# EAGLE board source_eagle (EAGLE 9.6.2)
REV: B
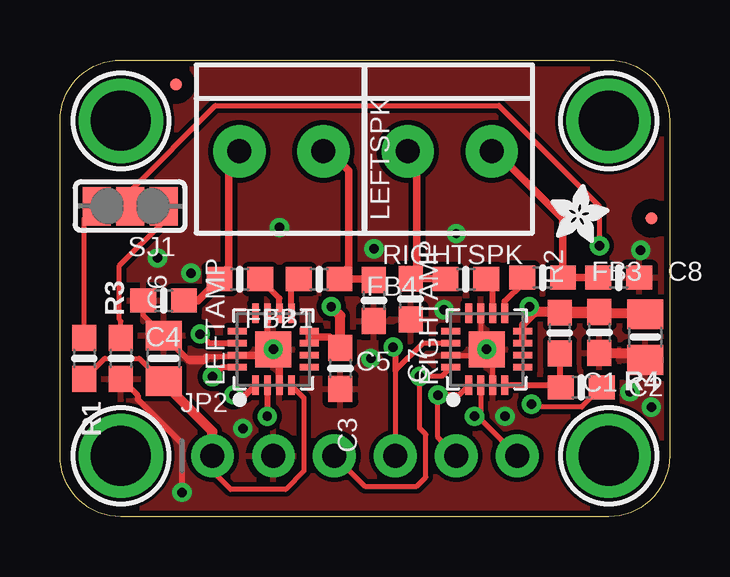
[diagram p0: board, top side]
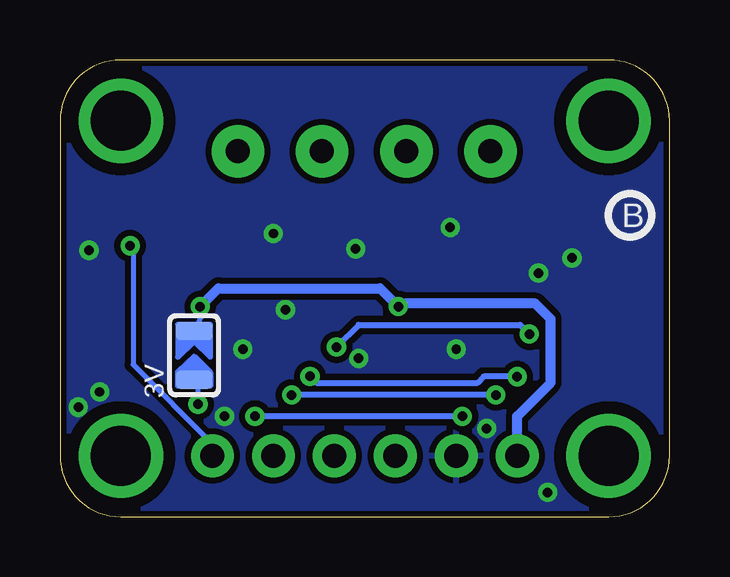
[diagram p1: board, bottom side, seen from below]

Size 25.4 x 19.05 mm. Coordinates in mm from the lower left corner, seen from the top.
Outline: 0,2.54 0,16.51 arc-90 2.54,19.05 22.86,19.05 arc-90 25.4,16.51 25.4,2.54 arc-90 22.86,0 2.54,0 arc-90 0,2.54
Copper layers (1*16): Top 0.035mm / dielectric 1.5mm / Bottom 0.035mm
Design rules "adafruit": minimum track width 8mil, minimum drill 15.5mil, track to track 8mil, track to pad 8mil, pad to pad 8mil, via to via 8mil, smd to smd 8mil, copper to edge 10mil, drill to drill 8mil, minimum pad ring 10mil, minimum via ring 8mil, stop-mask expansion 2mil, vias tented up to drill 20mil, thermal gap 10mil

## Footprints (pad centres in the part's own frame; a part is rotated, then mirrored left to right if it is on the bottom)
SOLDERJUMPER_ARROW_NOPASTE = smd 0.762 x 1.524: 1 -1.016,0; 2 1.016,0
0603-NO = smd 1.075 x 1: 1 -0.85,0; 2 0.85,0
0805-NO = smd 1.24 x 1.5: 1 -0.95,0; 2 0.95,0
FIDUCIAL_0.5MM = smd 0.5 x 0.5: 1 0,0
1X06_ROUND_70 = drill 1 pad 1.778: 1 -6.35,0; 2 -3.81,0; 3 -1.27,0; 4 1.27,0; 5 3.81,0; 6 6.35,0
QFN16_3MM = smd 0.8 x 0.28: 1 -1.5,0.75; 2 -1.5,0.25; 3 -1.5,-0.25; 4 -1.5,-0.75; 9 1.5,-0.75; 10 1.5,-0.25; 11 1.5,0.25; 12 1.5,0.75 | smd 0.28 x 0.8: 5 -0.75,-1.5; 6 -0.25,-1.5; 7 0.25,-1.5; 8 0.75,-1.5; 13 0.75,1.5; 14 0.25,1.5; 15 -0.25,1.5; 16 -0.75,1.5 | smd 1.5 x 1.5: THERMAL 0,0
TERMBLOCK_1X2-3.5MM = drill 1 pad 2.184: 1 1.8,0; 2 -1.7,0
SOLDERJUMPER_2WAY_OPEN_NOPASTE = smd 1.168 x 1.6: 1 -1.397,0; 2 0,0; 3 1.397,0
MOUNTINGHOLE_2.5_PLATED = drill 2.5 pad 3.2: P$1 0,0

## Placement (x,y rotation side)
3V  [SOLDERJUMPER_ARROW_NOPASTE]  19.81,6.73 90 bottom
C1  0.1uF  [0603-NO]  22.48,7.68 270 top
C2  10uF  [0805-NO]  24.38,7.49 270 top
C3  0.1uF  [0603-NO]  11.68,6.18 270 top
C4  220pF  [0603-NO]  4.32,9.02 180 top
C5  220pF  [0603-NO]  13.08,9.02 270 top
C6  10uF  [0805-NO]  4.32,6.6 90 top
C7  220pF  [0603-NO]  14.61,9.08 270 top
C8  220pF  [0603-NO]  23.28,9.97 0 top
FB1  Ferrite  [0603-NO]  10.79,9.91 0 top
FB2  Ferrite  [0603-NO]  7.49,9.91 180 top
FB3  Ferrite  [0603-NO]  20.11,9.97 0 top
FB4  Ferrite  [0603-NO]  16.92,9.91 180 top
FID1  FIDUCIAL_0.5MM  [FIDUCIAL_0.5MM]  24.64,12.45 0 top
FID2  FIDUCIAL_0.5MM  [FIDUCIAL_0.5MM]  4.83,18.03 0 top
JP2  [1X06_ROUND_70]  12.7,2.54 0 top
LEFTAMP  MAX98357A  [QFN16_3MM]  8.89,6.99 90 top
LEFTSPK  3.5mm  [TERMBLOCK_1X2-3.5MM]  9.27,15.24 180 top
PLABEL0  [PLABEL0]  14.1,0.89 0 top
PLABEL1  [PLABEL1]  11.56,4.06 0 top
PLABEL2  [PLABEL2]  16.51,4.06 0 top
PLABEL3  [PLABEL3]  18.92,0.89 0 top
PLABEL4  [PLABEL4]  6.29,4.06 0 top
PLABEL5  [PLABEL5]  8.89,0.89 0 top
PLABEL6  [PLABEL6]  9.27,11.05 0 top
PLABEL7  [PLABEL7]  16.38,11.05 0 top
PLABEL8  [PLABEL8]  6.86,11.05 0 top
PLABEL9  [PLABEL9]  11.81,11.05 0 top
PLABEL10  [PLABEL10]  19.05,11.05 0 top
PLABEL11  [PLABEL11]  13.72,11.05 0 top
PLABEL12  [PLABEL12]  4.95,11.18 0 top
PLABEL13  [PLABEL13]  3.05,11.18 0 top
PLABEL14  [PLABEL14]  1.14,11.18 0 top
PLABEL15  [PLABEL15]  3.05,10.29 0 top
PLABEL16  [PLABEL16]  12.83,11.18 0 bottom
PLABEL17  [PLABEL17]  12.7,17.53 0 bottom
PLABEL18  [PLABEL18]  23.11,6.99 0 bottom
PLABEL19  [PLABEL19]  11.68,5.84 0 bottom
R1  49.9K  [0603-NO]  1.02,6.6 270 top
R2  370K  [0603-NO]  20.83,7.66 90 top
R3  49.9K  [0603-NO]  2.54,6.6 90 top
R4  487K  [0603-NO]  21.72,5.4 0 top
RIGHTAMP  MAX98357A  [QFN16_3MM]  17.78,6.99 90 top
RIGHTSPK  3.5mm  [TERMBLOCK_1X2-3.5MM]  16.29,15.24 180 top
SJ1  [SOLDERJUMPER_2WAY_OPEN_NOPASTE]  2.92,12.95 180 top
U$9  MOUNTINGHOLE2.5  [MOUNTINGHOLE_2.5_PLATED]  22.86,16.51 0 top
U$10  MOUNTINGHOLE2.5  [MOUNTINGHOLE_2.5_PLATED]  2.54,16.51 0 top
U$14  [ADAFRUIT_2.5MM]  20.45,11.43 0 top
U$15  [PCBFEAT-REV-040]  1.65,12.57 0 bottom
U$23  MOUNTINGHOLE2.5  [MOUNTINGHOLE_2.5_PLATED]  2.54,2.54 0 top
U$24  MOUNTINGHOLE2.5  [MOUNTINGHOLE_2.5_PLATED]  22.86,2.54 0 top

## Library data of the parts
3V = microbuilder; BOM: EXCLUDE
C1-C8 FB1-FB4 FID1 FID2 JP2 R1-R4 SJ1 U$14 = microbuilder
LEFTAMP RIGHTAMP = microbuilder; ROT: 270
LEFTSPK RIGHTSPK = adafruit_electromech; FORCETHM: 1; ROT: 180
PLABEL0 PLABEL1-PLABEL19 = pinguin
U$9 U$10 U$23 U$24 = adafruit_electromech; BOM: EXCLUDE
U$15 = microbuilder; REV: B

## Nets
BCLK: JP2.3 LEFTAMP.16 RIGHTAMP.16
DIN: JP2.5 LEFTAMP.1 RIGHTAMP.1
GAIN: JP2.6 LEFTAMP.2 RIGHTAMP.2 SJ1.2
GND: C1.2 C2.2 C3.2 C4.2 C5.2 C6.2 C7.2 C8.2 JP2.2 LEFTAMP.3 LEFTAMP.11 LEFTAMP.15 LEFTAMP.THERMAL R3.1 RIGHTAMP.3 RIGHTAMP.11 RIGHTAMP.15 RIGHTAMP.THERMAL
LO+: C5.1 FB1.2 LEFTSPK.2
LO-: C4.1 FB2.2 LEFTSPK.1
LRCLK: JP2.4 LEFTAMP.14 RIGHTAMP.14
N$1: FB4.1 RIGHTAMP.10
N$2: FB3.1 RIGHTAMP.9
N$3: R3.2 SJ1.1
N$4: 3V.1 R4.2
N$5: FB2.1 LEFTAMP.10
N$6: FB1.1 LEFTAMP.9
N$7: R1.1 SJ1.3
RO+: C8.1 FB3.2 RIGHTSPK.2
RO-: C7.1 FB4.2 RIGHTSPK.1
SD: R2.1 R4.1 RIGHTAMP.4
VDD: 3V.2 C1.1 C2.1 C3.1 C6.1 JP2.1 LEFTAMP.4 LEFTAMP.7 LEFTAMP.8 R1.2 R2.2 RIGHTAMP.7 RIGHTAMP.8

## Tracks (layer width: path | path; a pad name or v marks a point on that pad's centre or on a via)
BCLK  (via drill 0.39)
  Top 0.203: JP2.3 12.7,1.27 14.86,1.27 15.24,1.65 15.24,3.43 14.99,3.68 v14.99,5.85 15.9,5.85 RIGHTAMP.16
  Top 0.254: LEFTAMP.16 6.74,6.24 v6.35,5.84
  Bottom 0.254: v6.35,5.84 7.75,5.84 8,5.59 14.72,5.59 v14.99,5.85
DIN  (via drill 0.39)
  Top 0.203: RIGHTAMP.1 16.62,5.08 v15.75,5.08 15.75,3.3 JP2.5
  Top 0.254: LEFTAMP.1 7.74,5.08 v7.24,5.08
  Bottom 0.254: v7.24,5.08 v15.75,5.08
GAIN  (via drill 0.39)
  Top 0.203: RIGHTAMP.2 17.53,4.19 17.53,4.06 JP2.6 | SJ1.2 2.92,13.59 6.48,17.14 18.29,17.14 22.48,12.95 v22.48,11.3
  Top 0.254: LEFTAMP.2 v8.64,4.2 v8.64,4.19 | v17.27,4.19 17.53,4.19
  Bottom 0.203: v22.48,11.3 22.35,11.18 22.35,6.35 19.05,3.05 JP2.6
  Bottom 0.254: v8.64,4.19 v17.27,4.19
GND  (via drill 0.39)
  Top 0.203: RIGHTAMP.3 18.03,6.74 RIGHTAMP.THERMAL | RIGHTAMP.15 17.53,6.74 RIGHTAMP.THERMAL | RIGHTAMP.11 17.53,7.24 RIGHTAMP.THERMAL | R3.1 2.54,5.46 | C6.2 3.47,8.4 C4.2 | 5.36,6.51 5.39,6.48 5.99,6.48 6.19,6.68 | LEFTAMP.15 7.33,6.68 6.19,6.68 | 6.1,6.68 6.19,6.68
  Top 0.254: LEFTAMP.11 8.64,7.24 | C6.2 5.3,6.57 | 5.3,6.57 5.36,6.51 | 6.1,6.68 5.99,6.57 5.3,6.57 | R3.1 3.24,5.06 3.24,4.9 5.08,3.06 v5.08,1.02
  Top 0.305: LEFTAMP.3 9.14,6.74 9.02,6.86 | 9.02,6.86 LEFTAMP.THERMAL 8.64,7.24 | LEFTAMP.15 8.89,6.74 9.02,6.86
  Top 0.406: C1.2 24.09,6.83 C2.2
  other vias: 8.89,6.99 17.78,6.99 16,8.64 18.54,4.19 24.64,4.57 24.19,11.11 16.51,11.81 13.08,11.18 9.14,12.06 5.46,10.16 4.06,10.79 7.62,3.68 12.95,6.6 23.75,5.21
  pour Bottom (isolate 0.254): 25.4,19.05 25.4,0 0,0 0,19.05
  pour Top (isolate 0.203): 25.4,19.05 25.4,0 0,0 0,19.05
LO+
  Top 0.203: LEFTSPK.2 11.07,15.34
  Top 0.305: C5.1 13.04,9.91 FB1.2 11.64,10.03 12.03,10.41 12.03,14.44 11.07,15.34
LO-
  Top 0.203: LEFTSPK.1 7.38,15.34
  Top 0.305: C4.1 5.74,9 FB2.2 6.64,10.03 7.02,10.41 7.02,15.05 7.38,15.34
LRCLK  (via drill 0.39)
  Top 0.203: RIGHTAMP.14 15.11,7.24 13.97,6.1 JP2.4
  Top 0.254: LEFTAMP.14 6.23,7.24 v5.84,7.62 | v13.88,7.08 13.97,6.99 13.97,6.1
  Bottom 0.254: v5.84,7.62 6.22,8 12.95,8 v13.88,7.08
N$1
  Top 0.254: RIGHTAMP.10 18.03,9.64 FB4.1
N$2
  Top 0.254: RIGHTAMP.9 18.53,8.99 19.25,9.72 FB3.1
N$3
  Top 0.203: R3.2 2.54,8.15 2.47,8.22 2.47,10.47 4.32,12.32 SJ1.1
N$4  (via drill 0.39)
  Top 0.203: R4.2 21.74,4.57 19.77,4.57 v19.65,4.7
  Bottom 0.203: 3V.1 19.65,5.71 v19.65,4.7
N$5
  Top 0.254: LEFTAMP.10 9.14,9.11 FB2.1
N$6
  Top 0.254: LEFTAMP.9 9.64,9.6
  Top 0.305: 9.64,9.6 FB1.1
N$7
  Top 0.203: R1.1 1.02,12.45 SJ1.3
RO+
  Top 0.203: RIGHTSPK.2 18.07,15.31
  Top 0.305: C8.1 FB3.2 20.95,12.43 18.07,15.31
RO-
  Top 0.203: RIGHTSPK.1 | RIGHTSPK.1 14.49,15.19
  Top 0.305: FB4.2 16.04,9.93 C7.1 14.61,10.18 14.86,10.44 14.86,15.17 14.49,15.19
SD
  Top 0.203: 20.83,5.59 20.87,5.55 R4.1 20.66,5.4 20.57,5.49
  Top 0.254: R2.1 20.83,5.59 | 20.57,5.49 RIGHTAMP.4
VDD  (via drill 0.39)
  Top 0.203: LEFTAMP.4 10.16,4.96 10.16,1.91 9.4,1.14 7.11,1.14 6.35,1.91 JP2.1 | R1.2 1.87,6.61 3.29,6.61 4.22,5.68
  Top 0.254: R2.2 20.89,8.44
  Top 0.305: LEFTAMP.8 10.39,7.49 | 10.39,7.49 LEFTAMP.7 | 10.39,7.49 11.22,7.49 C3.1 | RIGHTAMP.7 RIGHTAMP.8 19.28,8 19.81,8.53 C1.1 24.29,8.53 C2.1 20.89,8.44
  Top 0.406: JP2.1 6.35,3.56 4.29,5.62 | 4.29,5.62 4.22,5.68 | C6.1 4.29,5.62 | C3.1 11.68,8.38 v11.3,8.76 | C1.1 19.79,8.53 v19.56,8.76
  Bottom 0.203: 3V.2 19.39,8.59 v19.56,8.76
  Bottom 0.406: v19.56,8.76 18.8,9.53 12.06,9.53 v11.3,8.76 11.18,8.89 5.59,8.89 4.95,8.26 4.95,5.59 6.35,4.19 JP2.1

## Text on the board
Pinguin_tBackup: 3 | 9 | 15 | - | LEFT | + | - | RIGHT | + | Gain | Vin | BCLK | DIN | GND | LRC | GAIN
Pinguin_bBackup: 4-8Ω 3W Stereo | Dual MAX98357A / I2S Stereo Amps / Vin/Vlogic: 2.5-5.5V | Close / for 3V | Default Gain: 9dB / Jumpers: 3 or 15dB / Gain Pin: 6 or 12dB